# Altium PCB PCB.PcbDoc
Units mm, origin at the board's own origin, x right, y up, seen from the top; angles counter-clockwise.
Board outline 50 x 85 mm, 2 copper layers (Top Layer, Bottom Layer); 4 components, 42 nets, 192 pads, 0 vias.
Unrouted connection lines stored in the file: 67.
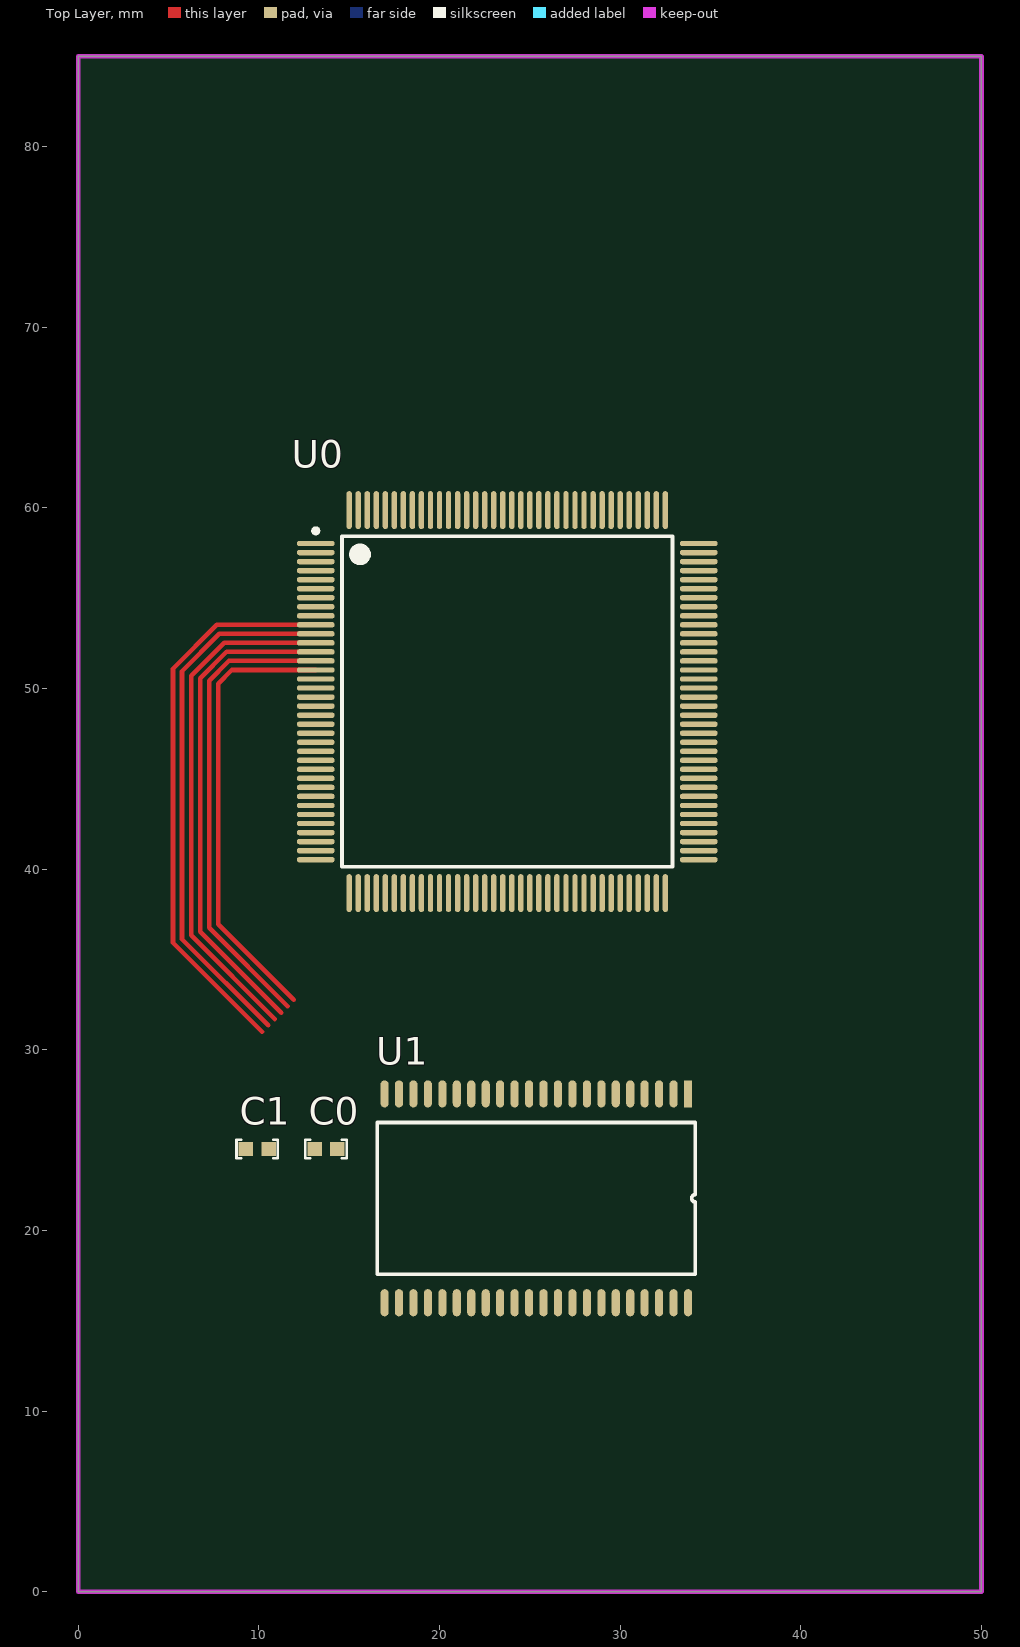
[diagram p0: Top Layer view]
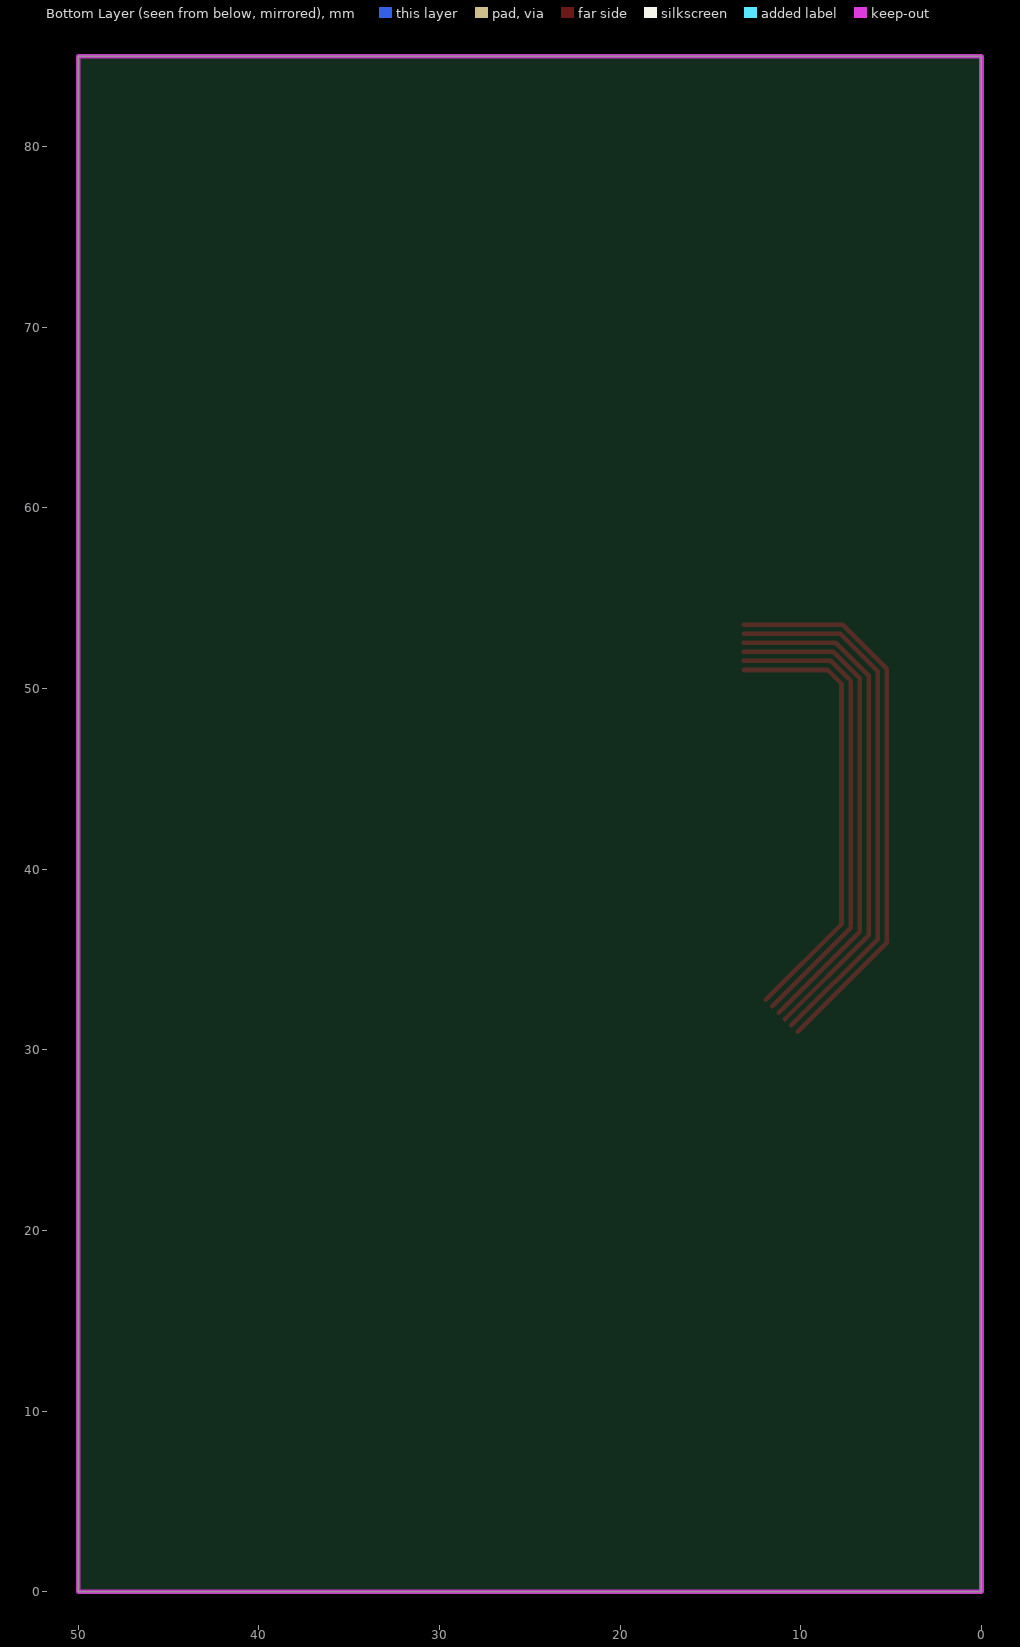
[diagram p1: Bottom Layer view, seen from below]

## Layer stack, top to bottom
Top Solder: solder mask 0.0102, Solder Resist, Dk 3.5
Top Layer: signal copper 0.0356
Dielectric 1: dielectric 0.32, FR-4, Dk 4.8
Bottom Layer: signal copper 0.0356
Bottom Solder: solder mask 0.0102, Solder Resist, Dk 3.5

## Board outline
0,0 0,85 50,85 50,0

## Design rules (kind name [scope] priority, off if disabled: settings)
Clearance [All] p1: gap=0.1 ignorepadtopadclearanceinfootprint=FALSE except(0: Arc-Hole Track-Hole SMDPad-Hole THPad-Hole Via-Hole Fill-Hole Poly-Hole Region-Hole Text-Hole)
PolygonConnect [All] p1: connectstyle=Relief reliefconductorwidth=0.254 reliefentries=4 polygonreliefangle="90 Angle" airgapwidth=0.254
RoutingVias [All] p1: holewidth=0.711 width=1.27 viastyle="Through Hole" minholewidth=0.711 minwidth=1.27 maxholewidth=0.711 maxwidth=1.27
SolderMaskExpansion [All] p1: expansion=0.102
Width [All] p1: maxlimit=0.254 minlimit=0.254 preferedwidth=0.254
30 further rules are at their usual default settings.

## Classes and differential pairs
component class 2-MIN-SYSTEM: C0 C1 U1
component class 1-stm32: U0

## Components (designator, comment, footprint, x,y, rotation, side; value= is the part's Value field where it differs from the comment)
C0 "100NF" CC1608-0603 13.716,24.511 r0 top
C1 "100NF" CC1608-0603 9.906,24.511 r0 top
U0 "stm32F407ZET6" STM-LQFP144_M 23.749,49.276 r0 top
U1 "IS62WV51216" TSOP44_M 33.756,27.559 r270 top

## Footprints (in the part's own frame and the unit in brackets; to place one, negate y for a bottom-side part, rotate by r counter-clockwise, add the part's x,y. Pads: shape width x height; smd on the part's side, far side on the other; paste and mask are expansions set on the pad)
CC1608-0603 [mm]
  rect 0.8x0.8 smd: 1(-0.635,0) 2(0.635,0)
  silkscreen extent -1.14,-0.51 1.14,0.51, body extent -0.8,-0.4 0.8,0.4, height 0.3
STM-LQFP144_M [mm] "Thin QFP, 144-Leads, Body 20x20mm, Pitch 0.5mm, IPC Low Density"
  oval 2.1x0.3 smd: 1(-10.6,8.75) 2(-10.6,8.25) 3(-10.6,7.75) 4(-10.6,7.25) 5(-10.6,6.75) 6(-10.6,6.25) 7(-10.6,5.75) 8(-10.6,5.25) 9(-10.6,4.75) 10(-10.6,4.25) 11(-10.6,3.75) 12(-10.6,3.25) 13(-10.6,2.75) 14(-10.6,2.25) 15(-10.6,1.75) 16(-10.6,1.25) 17(-10.6,0.75) 18(-10.6,0.25) 19(-10.6,-0.25) 20(-10.6,-0.75) 21(-10.6,-1.25) 22(-10.6,-1.75) 23(-10.6,-2.25) 24(-10.6,-2.75) 25(-10.6,-3.25) 26(-10.6,-3.75) 27(-10.6,-4.25) 28(-10.6,-4.75) 29(-10.6,-5.25) 30(-10.6,-5.75) 31(-10.6,-6.25) 32(-10.6,-6.75) 33(-10.6,-7.25) 34(-10.6,-7.75) 35(-10.6,-8.25) 36(-10.6,-8.75) 73(10.6,-8.75) 74(10.6,-8.25) 75(10.6,-7.75) 76(10.6,-7.25) 77(10.6,-6.75) 78(10.6,-6.25) 79(10.6,-5.75) 80(10.6,-5.25) 81(10.6,-4.75) 82(10.6,-4.25) 83(10.6,-3.75) 84(10.6,-3.25) 85(10.6,-2.75) 86(10.6,-2.25) 87(10.6,-1.75) 88(10.6,-1.25) 89(10.6,-0.75) 90(10.6,-0.25) 91(10.6,0.25) 92(10.6,0.75) 93(10.6,1.25) 94(10.6,1.75) 95(10.6,2.25) 96(10.6,2.75) 97(10.6,3.25) 98(10.6,3.75) 99(10.6,4.25) 100(10.6,4.75) 101(10.6,5.25) 102(10.6,5.75) 103(10.6,6.25) 104(10.6,6.75) 105(10.6,7.25) 106(10.6,7.75) 107(10.6,8.25) 108(10.6,8.75)
  oval 0.3x2.1 smd: 37(-8.75,-10.6) 38(-8.25,-10.6) 39(-7.75,-10.6) 40(-7.25,-10.6) 41(-6.75,-10.6) 42(-6.25,-10.6) 43(-5.75,-10.6) 44(-5.25,-10.6) 45(-4.75,-10.6) 46(-4.25,-10.6) 47(-3.75,-10.6) 48(-3.25,-10.6) 49(-2.75,-10.6) 50(-2.25,-10.6) 51(-1.75,-10.6) 52(-1.25,-10.6) 53(-0.75,-10.6) 54(-0.25,-10.6) 55(0.25,-10.6) 56(0.75,-10.6) 57(1.25,-10.6) 58(1.75,-10.6) 59(2.25,-10.6) 60(2.75,-10.6) 61(3.25,-10.6) 62(3.75,-10.6) 63(4.25,-10.6) 64(4.75,-10.6) 65(5.25,-10.6) 66(5.75,-10.6) 67(6.25,-10.6) 68(6.75,-10.6) 69(7.25,-10.6) 70(7.75,-10.6) 71(8.25,-10.6) 72(8.75,-10.6) 109(8.75,10.6) 110(8.25,10.6) 111(7.75,10.6) 112(7.25,10.6) 113(6.75,10.6) 114(6.25,10.6) 115(5.75,10.6) 116(5.25,10.6) 117(4.75,10.6) 118(4.25,10.6) 119(3.75,10.6) 120(3.25,10.6) 121(2.75,10.6) 122(2.25,10.6) 123(1.75,10.6) 124(1.25,10.6) 125(0.75,10.6) 126(0.25,10.6) 127(-0.25,10.6) 128(-0.75,10.6) 129(-1.25,10.6) 130(-1.75,10.6) 131(-2.25,10.6) 132(-2.75,10.6) 133(-3.25,10.6) 134(-3.75,10.6) 135(-4.25,10.6) 136(-4.75,10.6) 137(-5.25,10.6) 138(-5.75,10.6) 139(-6.25,10.6) 140(-6.75,10.6) 141(-7.25,10.6) 142(-7.75,10.6) 143(-8.25,10.6) 144(-8.75,10.6)
  silkscreen extent -10.72,-9.15 9.15,9.57, body extent -11,-11 11,11, height 2
TSOP44_M [mm]
  rect 1.5x0.45 smd: 1(0,0)
  oval 1.5x0.45 smd: 2(0,-0.8) 3(0,-1.6) 4(0,-2.4) 5(0,-3.2) 6(0,-4) 7(0,-4.8) 8(0,-5.6) 9(0,-6.4) 10(0,-7.2) 11(0,-8) 12(0,-8.8) 13(0,-9.6) 14(0,-10.4) 15(0,-11.2) 16(0,-12) 17(0,-12.8) 18(0,-13.6) 19(0,-14.4) 20(0,-15.2) 21(0,-16) 22(0,-16.8) 23(11.56,-16.8) 24(11.56,-16) 25(11.56,-15.2) 26(11.56,-14.4) 27(11.56,-13.6) 28(11.56,-12.8) 29(11.56,-12) 30(11.56,-11.2) 31(11.56,-10.4) 32(11.56,-9.6) 33(11.56,-8.8) 34(11.56,-8) 35(11.56,-7.2) 36(11.56,-6.4) 37(11.56,-5.6) 38(11.56,-4.8) 39(11.56,-4) 40(11.56,-3.2) 41(11.56,-2.4) 42(11.56,-1.6) 43(11.56,-0.8) 44(11.56,0)
  silkscreen extent 1.58,-17.2 9.98,0.4, body extent -0.16,-17.52 11.6,0.69, height 1.3

## Part data
C0 C1: library part "Cap Chip 0603", "电容", Published=8-Jun-2000, Publisher="Altium Limited", Revision="July-2002: Re-released for DXP Platform."
U1: "SRAM"

## Nets (pads, with @x,y where several pads share a name; then routed paths per layer and width w, separated by ;. In a path a pad name is that pad's centre, name@x,y a point inside that pad or via, vN(x,y) a via of type N, cw(c..) or ccw(c..) an arc to the next point about the centre after c; other vN are vias at no path point)
FSMC_A0: U0.10 U1.5 | length 31
  Top Layer w0.254: 10.172,30.997 5.247,35.921 5.247,51.094 7.679,53.526 U0.10
FSMC_A1: U0.11 U1.4 | length 29.8
  Top Layer w0.254: 10.525,31.351 5.747,36.129 5.747,50.959 7.814,53.026 U0.11
FSMC_A2: U0.12 U1.3 | length 28.6
  Top Layer w0.254: 10.878,31.705 6.247,36.336 6.247,50.697 8.076,52.526 U0.12
FSMC_A3: U0.13 U1.2 | length 27.4
  Top Layer w0.254: 11.231,32.059 6.747,36.543 6.747,50.562 8.211,52.026 U0.13
FSMC_A4: U0.14 U1.1 | length 26.2
  Top Layer w0.254: 11.585,32.412 7.247,36.75 7.247,50.427 8.346,51.526 U0.14
FSMC_A5: U0.15 U1.24 | length 25
  Top Layer w0.254: 11.938,32.766 7.747,36.957 7.747,50.264 8.509,51.026 U0.15
FSMC_A6: U0.50 U1.23
FSMC_A7: U0.53 U1.22
FSMC_A8: U0.54 U1.21
FSMC_A9: U0.55 U1.20
FSMC_A10: U0.56 U1.19
FSMC_A11: U0.57 U1.18
FSMC_A12: U0.87 U1.28
FSMC_A13: U0.88 U1.27
FSMC_A14: U0.89 U1.26
FSMC_A15: U0.90 U1.25
FSMC_A16: U0.80 U1.42
FSMC_A17: U0.81 U1.43
FSMC_A18: U0.82 U1.44
FSMC_D0: U0.85 U1.7
FSMC_D1: U0.86 U1.8
FSMC_D2: U0.115 U1.9
FSMC_D3: U0.114 U1.10
FSMC_D4: U0.58 U1.13
FSMC_D5: U0.59 U1.14
FSMC_D6: U0.60 U1.15
FSMC_D7: U0.63 U1.16
FSMC_D8: U0.64 U1.29
FSMC_D9: U0.65 U1.30
FSMC_D10: U0.66 U1.31
FSMC_D11: U0.67 U1.32
FSMC_D12: U0.68 U1.35
FSMC_D13: U0.77 U1.36
FSMC_D14: U0.78 U1.37
FSMC_D15: U0.79 U1.38
FSMC_NBL0: U0.141 U1.39
FSMC_NBL1: U0.142 U1.40
FSMC_NE3: U0.125 U1.6
FSMC_NOE: U0.118 U1.41
FSMC_NWE: U0.119 U1.17
GND: C0.1 C1.1 U0.16 U0.31 U0.38 U0.61 U0.83 U0.94 U0.107 U0.120 U0.130 U1.12 U1.34
VCC: C0.2 C1.2 U0.17 U0.30 U0.32 U0.39 U0.62 U0.72 U0.84 U0.95 U0.108 U0.121 U0.131 U0.144 U1.11 U1.33
pads on no net: U0.1 U0.2 U0.3 U0.4 U0.5 U0.6 U0.7 U0.8 U0.9 U0.18 U0.19 U0.20 U0.21 U0.22 U0.23 U0.24 U0.25 U0.26 U0.27 U0.28 U0.29 U0.33 U0.34 U0.35 U0.36 U0.37 U0.40 U0.41 U0.42 U0.43 U0.44 U0.45 U0.46 U0.47 U0.48 U0.49 U0.51 U0.52 U0.69 U0.70 U0.71 U0.73 U0.74 U0.75 U0.76 U0.91 U0.92 U0.93 U0.96 U0.97 U0.98 U0.99 U0.100 U0.101 U0.102 U0.103 U0.104 U0.105 U0.106 U0.109 U0.110 U0.111 U0.112 U0.113 U0.116 U0.117 U0.122 U0.123 U0.124 U0.126 U0.127 U0.128 U0.129 U0.132 U0.133 U0.134 U0.135 U0.136 U0.137 U0.138 U0.139 U0.140 U0.143

## Keep-outs
Keep-Out Layer:
  the board outline again, w0.254